# Altium PCB PCB.PcbDoc
Units mm, origin at the board's own origin, x right, y up, seen from the top; angles counter-clockwise.
Board outline 1240 x 25 mm, 2 copper layers (Top Layer, Bottom Layer); 39 components, 20 nets, 284 pads, 91 vias.
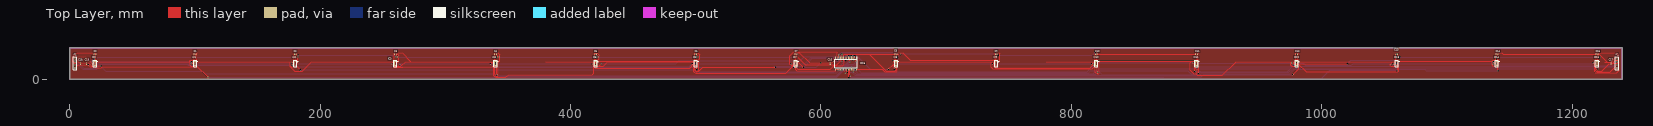
[diagram p0: Top Layer view]
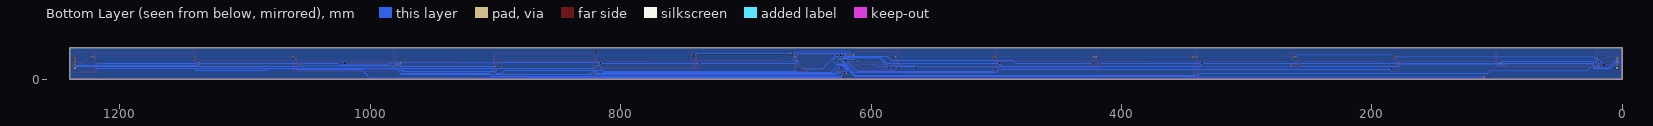
[diagram p1: Bottom Layer view, seen from below]
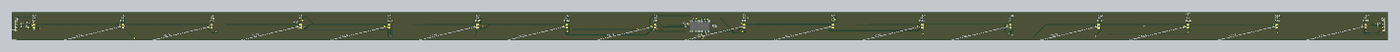
[diagram p2: 3D render of the assembled board from above, using the file's embedded part models]

## Layer stack, top to bottom
Top Solder: solder mask 0.0102, Solder Resist, Dk 3.5
Top Layer: signal copper 0.0356
Dielectric 1: dielectric 0.32, FR-4, Dk 4.8
Bottom Layer: signal copper 0.0356
Bottom Solder: solder mask 0.0102, Solder Resist, Dk 3.5

## Board outline
0,0 0,25 1240,25 1240,0

## Design rules (kind name [scope] priority, off if disabled: settings)
Clearance [All] p1: gap=0.254 ignorepadtopadclearanceinfootprint=FALSE except(0: Arc-Hole Track-Hole SMDPad-Hole THPad-Hole Via-Hole Fill-Hole Poly-Hole Region-Hole Text-Hole)
PolygonConnect [All] p1: connectstyle=Relief reliefconductorwidth=0.254 reliefentries=4 polygonreliefangle="90 Angle" airgapwidth=0.254
RoutingVias [All] p1: holewidth=0.711 width=1.27 viastyle="Through Hole" minholewidth=0.711 minwidth=1.27 maxholewidth=0.711 maxwidth=1.27
SolderMaskExpansion [All] p1: expansion=0.102 istentingtop=FALSE
Width [All] p1: maxlimit=0.254 minlimit=0.254 preferedwidth=0.254
30 further rules are at their usual default settings.

## Components (designator, comment, footprint, x,y, rotation, side; value= is the part's Value field where it differs from the comment)
C0 "100nF" CAPC1608X90N 20,20 r0 top locked
C1 "100nF" CAPC1608X90N 100,20 r180 top locked
C2 "100nF" CAPC1608X90N 180,20 r180 top locked
C3 "100nF" CAPC1608X90N 260,20 r180 top locked
C4 "100nF" CAPC1608X90N 340,20 r180 top locked
C5 "100nF" CAPC1608X90N 420,20 r180 top locked
C6 "100nF" CAPC1608X90N 500,20 r180 top locked
C7 "100nF" CAPC1608X90N 580,20 r180 top locked
C8 "100nF" CAPC1608X90N 660,20 r180 top locked
C9 "100nF" CAPC1608X90N 740,20 r180 top locked
C10 "100nF" CAPC1608X90N 820,20 r180 top locked
C11 "100nF" CAPC1608X90N 900,20 r0 top locked
C12 "100nF" CAPC1608X90N 980,20 r180 top locked
C13 "100nF" CAPC1608X90N 1060,20 r180 top locked
C14 "100nF" CAPC1608X90N 1140,20 r180 top locked
C15 "100nF" CAPC1608X90N 1220,20 r180 top locked
C16 "100nF" CAPC1608X90N 607.441,12.446 r90 top locked
C17 "100nF" CAPC1608X90N 1231.265,12.889 r270 top locked
C18 "100nF" CAPC1608X90N 8.382,12.319 r90 top locked
C19 "100uF" CAPC1608X90N 13.208,12.319 r270 top locked
IC0 "VL53L1X" VL53L1X 20,12.5 r0 top locked
IC1 "VL53L1X" VL53L1X 100,12.5 r0 top locked
IC2 "VL53L1X" VL53L1X 180,12.5 r0 top locked
IC3 "VL53L1X" VL53L1X 260,12.5 r0 top locked
IC4 "VL53L1X" VL53L1X 340,12.5 r0 top locked
IC5 "VL53L1X" VL53L1X 420,12.5 r0 top locked
IC6 "VL53L1X" VL53L1X 500,12.5 r0 top locked
IC7 "VL53L1X" VL53L1X 580,12.5 r0 top locked
IC8 "VL53L1X" VL53L1X 660,12.5 r0 top locked
IC9 "VL53L1X" VL53L1X 740,12.5 r0 top locked
IC10 "VL53L1X" VL53L1X 820,12.5 r0 top locked
IC11 "VL53L1X" VL53L1X 900,12.5 r0 top locked
IC12 "VL53L1X" VL53L1X 980,12.5 r0 top locked
IC13 "VL53L1X" VL53L1X 1060,12.5 r0 top locked
IC14 "VL53L1X" VL53L1X 1140,12.5 r0 top locked
IC15 "VL53L1X" VL53L1X 1220,12.5 r0 top locked
IC16 "MCP23017T-E_SO" SOIC127P1030X265-28N 620,12.5 r270 top locked
P1 "IN" HDR1X4 4,9 r90 top locked
P2 "OUT" HDR1X4 1236,9 r90 top locked

## Footprints (in the part's own frame and the unit in brackets; to place one, negate y for a bottom-side part, rotate by r counter-clockwise, add the part's x,y. Pads: shape width x height; smd on the part's side, far side on the other; paste and mask are expansions set on the pad)
CAPC1608X90N [mm]
  rect 0.78x0.99 smd: 1(-0.7,0) 2(0.7,0)
  body extent -0.8,-0.41 0.8,0.41, height 0.9
HDR1X4 [mm] "Connector; Header; 4 Position"
  rect 1.5x1.5 hole 0.9: 1(0,0)
  round 1.5 hole 0.9: 2(2.54,0) 3(5.08,0) 4(7.62,0)
  silkscreen extent -1.27,-1.27 8.89,1.27
SOIC127P1030X265-28N [mm]
  rect 1.85x0.65 smd: 1(-4.675,8.255) 2(-4.675,6.985) 3(-4.675,5.715) 4(-4.675,4.445) 5(-4.675,3.175) 6(-4.675,1.905) 7(-4.675,0.635) 8(-4.675,-0.635) 9(-4.675,-1.905) 10(-4.675,-3.175) 11(-4.675,-4.445) 12(-4.675,-5.715) 13(-4.675,-6.985) 14(-4.675,-8.255) 15(4.675,-8.255) 16(4.675,-6.985) 17(4.675,-5.715) 18(4.675,-4.445) 19(4.675,-3.175) 20(4.675,-1.905) 21(4.675,-0.635) 22(4.675,0.635) 23(4.675,1.905) 24(4.675,3.175) 25(4.675,4.445) 26(4.675,5.715) 27(4.675,6.985) 28(4.675,8.255)
  silkscreen extent -5.6,-8.95 3.4,8.95, body extent -5.15,-8.95 5.15,8.95, height 2.65
VL53L1X [mm]
  rect 0.5x0.5 smd: 1(0.8,1.6) 2(0.8,0.8) 3(0.8,0) 4(0.8,-0.8) 5(0.8,-1.6) 6(0,-1.6) 7(-0.8,-1.6) 8(-0.8,-0.8) 9(-0.8,0) 10(-0.8,0.8) 11(-0.8,1.6) 12(0,1.6)
  rect 0.25x0.08 smd: 13(0.675,1.89)
  silkscreen extent -1.25,-2.4 1.9,2.45, body extent -1.25,-2.45 1.25,2.45, height 1.56

## Part data
C0 C1 C2 C3 C4 C5 C6 C7 C8 C9 C10 C11 C12 C13 C14 C15 C16 C17 C18: library part 0603YC104K4T2A, "Capacitor", Manufacturer_Name="Kyocera AVX", Mouser Part Number=581-0603YC104K4, Arrow Part Number=0603YC104K4T2A, Arrow Price/Stock=https://www.arrow.com/en/products/0603yc104k4t2a/avx, Datasheet Link=https://componentsearchengine.com/Datasheets/1/06031A100FAT2A.pdf, Height=0.9mm, Manufacturer_Part_Number=0603YC104K4T2A, Mouser Price/Stock=https://www.mouser.co.uk/ProductDetail/AVX/0603YC104K4T2A/?qs=Cej1j9ztgjHj4I01NaBI3A%3D%3D
C19: library part 06033C474MAT2A, "Capacitor", Manufacturer_Name="Kyocera AVX", Mouser Part Number=581-06033C474MAT2A, Datasheet Link=https://componentsearchengine.com/Datasheets/1/06031A100FAT2A.pdf, Height=0.9mm, Manufacturer_Part_Number=06033C474MAT2A, Mouser Price/Stock=https://www.mouser.com/Search/Refine.aspx?Keyword=581-06033C474MAT2A
IC0 IC1 IC2 IC3 IC4 IC5 IC6 IC7 IC8 IC9 IC10 IC11 IC12 IC13 IC14 IC15: "Integrated Circuit", Manufacturer_Name=STMicroelectronics, Datasheet Link=https://www.st.com/resource/en/datasheet/vl53l1x.pdf, Height=1.6mm, Manufacturer_Part_Number=VL53L1X
IC16: "Integrated Circuit", Arrow Part Number=MCP23017T-E/SO, Manufacturer_Name=Microchip, Mouser Part Number=579-MCP23017T-E/SO, Arrow Price/Stock=https://www.arrow.com/en/products/mcp23017t-eso/microchip-technology?region=nac, Datasheet Link=http://ww1.microchip.com/downloads/en/DeviceDoc/20001952C.pdf, Height=2.65mm, Manufacturer_Part_Number=MCP23017T-E/SO, Mouser Price/Stock=https://www.mouser.co.uk/ProductDetail/Microchip-Technology/MCP23017T-E-SO?qs=usxtMOJb1RylPfT%252BJtgE3Q%3D%3D
P1 P2: library part "Header 4", "Header, 4-Pin", LatestRevisionDate=17-Jul-2002, LatestRevisionNote="Re-released for DXP Platform.", Publisher="Altium Limited"

## Via types
v1: diameter 1.27, hole 0.711, Top Layer to Bottom Layer, 91 vias

## Nets (pads, with @x,y where several pads share a name; then routed paths per layer and width w, separated by ;. In a path a pad name is that pad's centre, name@x,y a point inside that pad or via, vN(x,y) a via of type N, cw(c..) or ccw(c..) an arc to the next point about the centre after c; other vN are vias at no path point)
3.3V: C0.2 C1.2 C2.2 C3.2 C4.2 C5.2 C6.2 C7.2 C8.2 C9.2 C10.2 C11.2 C12.2 C13.2 C14.2 C15.2 C16.2 C17.2 C18.2 C19.1 IC0.1 IC0.7 IC0.11 IC0.13 IC1.1 IC1.7 IC1.11 IC1.13 IC2.1 IC2.7 IC2.11 IC2.13 IC3.1 IC3.7 IC3.11 IC3.13 IC4.1 IC4.7 IC4.11 IC4.13 IC5.1 IC5.7 IC5.11 IC5.13 IC6.1 IC6.7 IC6.11 IC6.13 IC7.1 IC7.7 IC7.11 IC7.13 IC8.1 IC8.7 IC8.11 IC8.13 IC9.1 IC9.7 IC9.11 IC9.13 IC10.1 IC10.7 IC10.11 IC10.13 IC11.1 IC11.7 IC11.11 IC11.13 IC12.1 IC12.7 IC12.11 IC12.13 IC13.1 IC13.7 IC13.11 IC13.13 IC14.1 IC14.7 IC14.11 IC14.13 IC15.1 IC15.7 IC15.11 IC15.13 IC16.9 P1.4 P2.1 | length 1970.9
  Top Layer w0.254: P1.4 5.156,15.464 ; IC0.7 16.919,10.9 14.8,13.019 C19.1 C18.2 7.601,13.019 5.156,15.464 ; IC0.11 19.2,14.738 20.65,14.738 20.65,14.39 IC0.13 ; IC1.7 96.506,10.9 96.114,11.292 96.114,14.51 96.647,15.043 ; IC2.7 178.277,9.977 177.024,9.977 176.149,10.852 ; C2.2 179.3,18.496 ; IC2.1 180.675,14.225 IC2.13 180.696,14.39 180.696,17.101 179.3,18.496 ; IC3.7 259.2,10.522 259.454,10.268 264.389,10.268 268.224,14.103 272.364,14.103 ; IC3.1 260.675,14.225 IC3.13 260.629,14.39 260.629,14.738 259.461,14.738 259.2,14.477 ; IC4.7 339.2,3.935 340.741,2.394 341.757,2.394 342.265,2.902 342.265,13.062 IC4.1@341.013,14.314 ; IC5.7 419.2,10.447 419.481,10.166 425.882,10.166 429.819,14.103 497.278,14.103 497.281,14.1 IC6.11 ; IC5.1 420.675,14.225 IC5.13 420.8,14.39 421.107,14.39 ; IC6.7 499.2,7.765 ; v1(563.626,9.531) 505.409,9.531 502.336,6.458 501.816,6.458 ; v1(578.209,9.531) 579.2,10.522 IC7.7 ; IC7.11 579.3,17.099 C7.2 579.3,20.682 579.935,21.317 582.727,21.317 590.898,13.146 v1(599.846,13.146) C16.2 608.439,13.146 v1(609.727,14.434) ; IC7.1 580.675,14.225 IC7.13 580.8,14.39 581.119,14.39 581.431,14.078 ; v1(581.431,9.531) 581.431,14.078 ; v1(585.978,9.531) 581.431,14.078 ; v1(617.017,14.434) 618.095,15.512 IC16.9 618.095,19.601 618.49,19.996 638.429,19.996 ; IC8.7 659.2,9.512 660.019,8.693 660.019,7.576 658.8,6.356 652.069,6.356 638.429,19.996 ; IC8.11 659.3,17.099 C8.2@659.3,19.996 ; IC8.13 660.675,14.225 IC8.1 737.235,14.1 ; IC9.7 739.191,10.891 739.191,10.522 739.445,10.268 741.451,10.268 741.451,13.824 741.175,14.1 IC9.1 ; C10.2 819.3,16.999 819.2,16.899 IC10.11 780.012,14.1 741.046,14.346 IC9.1 ; IC11.7 898.982,10.682 898.982,8.896 900.506,7.372 900.506,5.569 899.389,4.451 ; C11.2 900.7,17.202 900.675,17.177 IC11.13 ; IC11.1 900.675,14.225 IC11.13 ; IC12.7 978.695,10.395 976.008,10.395 975.131,11.272 975.131,14.1 ; IC13.7 1058.771,10.471 1055.243,10.471 1054.735,10.979 1054.735,11.995 1056.84,14.1 ; C13.2 1059.3,17.099 1059.2,16.999 1059.2,14.377 ; IC14.7 1136.196,10.9 1136.117,10.98 1136.117,14.637 ; IC14.1 1140.675,14.225 IC14.13 1140.638,14.39 1140.638,14.738 1139.571,14.738 1139.2,14.367 ; IC15.7 1219.2,7.982 1220.724,6.458 1223.924,6.458 1229.655,12.189 C17.2 ; IC15.11 1219.3,17.099 1219.3,18.499 ; IC15.1 1220.675,14.225 IC15.13 1220.699,14.39 1220.699,17.101 1219.3,18.499 ; P2.1 1237.131,10.131 1237.131,12.656 1237.106,12.681 1232.519,12.681 ; 5.156,15.464 5.156,13.57 4.394,12.808 3.607,12.808 2.337,14.078 2.337,17.863 5.74,21.266 20.116,21.266 20.7,20.682 C0.2 20.7,17.202 20.675,17.177 IC0.13 ; IC0.13 20.675,14.225 IC0.1 95.196,14.1 96.139,15.043 96.647,15.043 ; 96.647,15.043 98.257,15.043 IC1.11 99.2,16.999 99.3,17.099 C1.2 99.3,20.744 99.695,21.139 101.219,21.139 101.473,20.885 101.473,14.644 101.219,14.39 IC1.13 100.675,14.225 IC1.1 176.654,14.1 ; 176.149,10.852 176.149,13.595 176.654,14.1 ; 176.149,10.852 176.149,10.014 179.603,6.56 185.75,6.56 193.291,14.1 IC3.11 259.2,14.477 ; 176.654,14.1 IC2.11 179.3,17.099 179.3,18.496 ; 259.2,14.477 259.2,16.999 259.3,17.099 C3.2 259.3,20.682 259.706,21.088 265.379,21.088 272.364,14.103 ; 272.364,14.103 338.15,14.103 338.154,14.1 IC4.11 339.2,16.999 339.3,17.099 C4.2 339.3,20.74 339.725,21.165 341.605,21.165 343.408,19.361 343.408,14.771 343.027,14.39 IC4.13 340.675,14.225 IC4.1 IC4.1@341.013,14.314 ; IC4.1@341.013,14.314 341.046,14.346 380.013,14.1 IC5.11 419.2,16.999 419.3,17.099 C5.2 419.3,20.885 421.259,20.885 422.986,19.158 422.986,16.27 421.107,14.39 ; 421.107,14.39 498.91,14.39 IC6.11 ; 499.2,7.765 499.2,7.042 500.292,5.95 501.308,5.95 501.816,6.458 ; 499.2,7.765 500.507,6.458 501.816,6.458 ; IC6.11 499.2,16.999 499.3,17.099 C6.2 499.3,20.694 499.745,21.139 501.523,21.139 502.996,19.666 502.996,16.296 IC6.1@501.049,14.349 ; IC6.1@501.049,14.349 IC6.1 500.675,14.225 IC6.13 501.008,14.39 IC6.1@501.049,14.349 ; IC6.1@501.049,14.349 502.324,13.074 502.324,6.966 501.816,6.458 ; 638.429,19.996 C8.2@659.3,19.996 ; C8.2@659.3,19.996 C8.2 659.3,20.682 659.572,20.954 665.462,20.954 671.347,15.069 738.231,15.069 IC9.11 ; 737.235,14.1 IC9.11 ; 737.235,14.1 736.143,13.062 736.143,9.379 737.235,8.287 816.587,8.287 IC10.7 819.2,5.671 820.547,4.324 821.868,4.324 822.223,4.68 822.223,13.222 821.099,14.346 ; IC9.11 739.2,16.899 739.3,16.999 C9.2 739.3,20.682 739.833,21.215 742.467,21.215 743.001,20.682 743.001,14.822 742.569,14.39 IC9.13 740.675,14.225 IC9.1 ; 821.099,14.346 896.18,14.346 ; 821.099,14.346 821.046,14.346 IC10.1 820.675,14.225 IC10.13 821.055,14.39 821.099,14.346 ; 896.18,14.346 895.121,13.287 895.121,7.144 897.941,4.324 899.262,4.324 899.389,4.451 ; 896.18,14.346 897.782,14.346 898.028,14.1 IC11.11 899.2,14.397 899.541,14.738 900.633,14.738 900.633,14.39 IC11.13 ; 899.389,4.451 900.659,3.181 920.725,3.181 931.647,14.103 975.131,14.1 ; 975.131,14.1 975.661,14.1 IC12.11 979.2,16.999 979.3,17.099 C12.2 979.3,20.682 979.757,21.139 981.075,21.139 981.481,20.733 981.481,14.796 981.075,14.39 IC12.13 980.675,14.225 IC12.1 1056.84,14.1 ; 1056.84,14.1 IC13.11 1059.2,14.377 ; 1059.2,14.377 1059.561,14.738 1060.653,14.738 1060.653,14.39 IC13.13 1060.675,14.225 IC13.1 1060.905,14.205 1135.685,14.205 1136.117,14.637 ; 1136.117,14.637 1136.523,15.043 1138.257,15.043 IC14.11 1139.2,14.367 ; 1139.2,14.367 1139.2,16.999 1139.3,17.099 C14.2 1139.3,20.682 1139.859,21.241 1143.864,21.241 1145.108,19.996 C15.2@1219.3,19.996 ; 1219.3,18.499 C15.2@1219.3,19.996 ; C15.2@1219.3,19.996 C15.2 1219.3,20.782 1219.835,21.317 1235.456,21.317 1237.132,19.641 1237.132,15.754 1236.599,15.221 1235.059,15.221 1232.519,12.681 ; C17.2 1231.265,12.681 1232.519,12.681 ; C17.2 1232.027,12.189 1232.519,12.681
  Bottom Layer w0.254: v1(563.626,9.531) v1(578.209,9.531) v1(581.431,9.531) ; v1(585.978,9.531) 596.232,9.531 v1(599.846,13.146) ; v1(609.727,14.434) v1(617.017,14.434)
GND: C0.1 C1.1 C2.1 C3.1 C4.1 C5.1 C6.1 C7.1 C8.1 C9.1 C10.1 C11.1 C12.1 C13.1 C14.1 C15.1 C16.1 C17.1 C18.1 C19.2 IC0.2 IC0.3 IC0.4 IC0.6 IC0.12 IC1.2 IC1.3 IC1.6 IC1.12 IC2.2 IC2.3 IC2.4 IC2.6 IC2.12 IC3.2 IC3.3 IC3.4 IC3.6 IC3.12 IC4.2 IC4.3 IC4.4 IC4.6 IC4.12 IC5.3 IC5.4 IC5.6 IC5.12 IC6.2 IC6.3 IC6.4 IC6.6 IC6.12 IC7.2 IC7.3 IC7.4 IC7.6 IC7.12 IC8.2 IC8.3 IC8.4 IC8.6 IC8.12 IC9.2 IC9.3 IC9.4 IC9.6 IC9.12 IC10.2 IC10.3 IC10.4 IC10.12 IC11.2 IC11.3 IC11.4 IC11.6 IC11.12 IC12.2 IC12.3 IC12.4 IC12.6 IC12.12 IC13.2 IC13.3 IC13.4 IC13.6 IC13.12 IC14.2 IC14.3 IC14.4 IC14.6 IC14.12 IC15.2 IC15.3 IC15.4 IC15.6 IC15.12 IC16.10 IC16.15 IC16.16 IC16.17 P1.1 P2.4 | length 1683.9
  Top Layer w0.254: P1.1 6.619,11.619 C18.1 C19.2 v1(14.678,11.619) 16.4,9.897 ; v1(19.3,16.241) C0.1 ; v1(19.99,9.887) 16.41,9.887 16.4,9.897 ; IC0.12 20,13.57 20.27,13.3 IC0.2 IC0.3 IC0.4 20.416,11.7 20,11.284 IC0.6 v1@20,10.466 ; C1.1 100.7,16.429 100,15.729 IC1.12 100,13.824 100.524,13.3 IC1.2 IC1.3 100.454,12.5 100,12.046 IC1.6 100,9.912 99.975,9.887 25.73,9.887 25.136,9.293 20.604,9.293 20,9.897 v1@20,10.466 ; IC2.6 180,11.284 180.416,11.7 IC2.4 IC2.3 IC2.2 ; IC2.12 180,13.824 180.524,13.3 IC2.2 ; C2.1 C2.1@180.7,19.895 ; v1(181.991,19.234) 181.331,19.895 C2.1@180.7,19.895 ; IC3.6 260,11.284 260.416,11.7 IC3.4 IC3.3 ; IC3.12 260,13.824 260.524,13.3 IC3.2 IC3.3 ; v1(260.7,17.71) 260.7,18.986 ; C3.1 C3.1@260.7,19.895 ; v1(261.976,17.71) 260.7,18.986 ; IC4.6 340,11.284 340.416,11.7 IC4.4 IC4.3 IC4.2 340.524,13.3 340,13.824 IC4.12 340,15.729 340.7,16.429 v1(340.7,17.71) 340.7,19.385 ; C4.1 340.7,19.385 ; v1(342.375,17.71) 340.7,19.385 ; IC5.6 420,11.284 420.416,11.7 IC5.4 IC5.3 420.308,12.5 420,12.808 IC5.12 420,16.135 420.7,16.835 v1(420.7,17.71) 420.7,18.98 ; C5.1 420.7,18.98 ; v1(421.97,17.71) 420.7,18.98 ; IC6.6 500,11.284 500.416,11.7 IC6.4 IC6.3 IC6.2 500.524,13.3 500,13.824 IC6.12 500,15.729 500.7,16.429 v1(500.7,17.71) 500.7,18.99 ; C6.1 500.7,18.99 ; v1(501.98,17.71) 500.7,18.99 ; v1(580.7,17.71) v1@580.7,18.32 ; C7.1 v1@580.7,18.32 ; IC16.17 IC16.16 IC16.15 611.745,6.712 580.517,6.712 579.831,7.398 579.831,10.9 IC7.6 580,11.284 580.416,11.7 IC7.4 IC7.3 IC7.2 580.431,13.3 580,13.731 IC7.12 580,17.62 v1@580.7,18.32 ; v1(616.825,19.945) v1(616.825,19.398) IC16.10 616.825,16.11 612.461,11.746 C16.1 587.274,11.746 v1@580.7,18.32 ; IC8.6 660,11.173 660.527,11.7 IC8.4 IC8.3 IC8.2 660.441,13.3 660,13.741 IC8.12 660,17.005 v1(660.705,17.71) ; v1(660.7,17.71) C8.1@660.7,19.895 ; C8.1 C8.1@660.7,19.895 ; v1(663.219,19.895) C8.1@660.7,19.895 ; IC9.6 740,11.417 740.283,11.7 IC9.4 IC9.3 IC9.2 740.451,13.3 740,13.751 IC9.12 740,16.767 ; v1(741.299,18.752) 740.669,19.381 ; v1(741.985,18.752) 740,16.767 ; v1(819.302,21.571) 820.039,21.571 820.7,20.91 C10.1 ; IC10.4 IC10.3 IC10.2 820.461,13.3 820,13.761 IC10.12 820,15.715 820.7,16.415 C10.1 ; C11.1 C11.1@899.3,20.022 ; v1(900,9.887) IC11.6 900,11.397 900.303,11.7 IC11.4 ; IC11.12 900,13.771 900.471,13.3 IC11.2 IC11.3 IC11.4 ; IC12.6 980,11.7 980.008,11.708 ; v1(980.008,9.887) 980.008,11.708 ; C12.1 980.7,16.429 980,15.729 IC12.12 980,13.781 980.481,13.3 IC12.2 ; IC12.4 IC12.3 ; v1(1020.467,12.5) IC12.3 ; IC13.6 1060,11.377 1060.323,11.7 IC13.4 ; IC13.12 1060,13.791 1060.491,13.3 IC13.2 IC13.3 IC13.4 ; v1(1060.7,17.71) 1060.7,18.984 ; C13.1 1060.7,18.984 ; v1(1061.974,17.71) 1060.7,18.984 ; IC14.6 1140,11.367 1140.333,11.7 IC14.4 IC14.3 IC14.2 ; IC14.12 1140,13.801 1140.501,13.3 IC14.2 ; C14.1 v1(1140.7,17.71) 1140.7,15.489 1141.451,14.738 1141.451,13.468 IC14.2 ; IC15.6 1220,11.357 1220.343,11.7 IC15.4 IC15.3 IC15.2 ; IC15.12 1220,13.811 1220.511,13.3 IC15.2 ; C15.1 C15.1@1220.7,19.895 ; v1(1221.969,17.71) 1220.7,18.979 C15.1@1220.7,19.895 ; P2.4 1234.296,16.62 C17.1 1228.198,13.589 ; 16.4,9.897 19.431,9.897 v1@20,10.466 ; C2.1@180.7,19.895 180.7,19.001 v1(181.991,17.71) 181.991,13.253 181.483,12.745 181.355,12.745 IC2.2 ; 260.7,18.986 C3.1@260.7,19.895 ; C3.1@260.7,19.895 261.899,19.895 262.611,19.183 262.611,14.311 IC3.3 ; 740,16.767 740,18.712 740.669,19.381 ; 740.669,19.381 740.7,19.412 C9.1 740.669,19.381 ; C10.1 895.227,20 895.248,20.022 C11.1@899.3,20.022 ; C11.1@899.3,20.022 899.3,20.682 899.935,21.317 900.836,21.317 901.471,20.682 901.471,12.371 IC11.4 ; 980.008,11.708 980.008,12.508 IC12.2 ; 980.008,11.708 IC12.3 ; IC12.3 987.528,5.772 1060.831,5.772 1061.441,6.382 1061.441,11.344 1061.085,11.7 IC13.4 ; IC12.3 IC12.2 ; C15.1@1220.7,19.895 1221.892,19.895 1228.198,13.589 ; IC15.2 1226.169,13.589 1228.198,13.589
  Bottom Layer w0.254: v1(14.678,11.619) v1(19.3,16.241) ; v1(19.99,9.887) 19.99,15.551 22.149,17.71 v1(181.991,17.71) ; v1(181.991,19.234) 259.176,19.234 v1(260.7,17.71) ; v1(261.976,17.71) v1(340.7,17.71) ; v1(342.375,17.71) v1(420.7,17.71) ; v1(421.97,17.71) v1(500.7,17.71) ; v1(501.98,17.71) v1(580.7,17.71) ; v1(616.825,19.398) 617.83,20.403 ; v1(616.825,19.945) 617.282,20.403 617.83,20.403 ; v1(660.7,17.71) 658.008,20.403 ; v1(660.705,17.71) 658.012,20.403 658.008,20.403 ; v1(663.219,19.895) 663.778,20.453 739.597,20.453 v1(741.299,18.752) ; v1(741.985,18.752) 742.544,19.31 817.042,19.31 v1(819.302,21.571) ; v1(900,9.887) 974.877,9.887 977.417,12.427 978.535,12.427 980.008,10.954 v1(980.008,9.887) ; v1(1020.467,12.5) 1023.188,15.221 1058.211,15.221 v1(1060.7,17.71) ; v1(1061.974,17.71) v1(1140.7,17.71) v1(1221.969,17.71) ; 617.83,20.403 658.008,20.403
GPA0: IC8.5 IC16.28 | length 38.7
  Top Layer w0.254: IC16.28 628.255,7.83 649.148,7.83 651.129,5.848 660.527,5.848 661.086,6.407 661.086,10.9 IC8.5
GPA1: IC16.27
GPA2: IC10.5 IC16.26 | length 204.5
  Top Layer w0.254: v1(625.715,6.139) IC16.26 ; IC10.5 820.8,5.748 v1(821.207,5.34)
  Bottom Layer w0.254: v1(625.715,6.139) 628.038,3.816 819.683,3.816 v1(821.207,5.34)
GPA3: IC11.5 IC16.25 | length 290.1
  Top Layer w0.254: IC16.25 v1(624.445,9.506) ; IC11.5 901.7,10 v1(901.7,4.68)
  Bottom Layer w0.254: v1(624.445,9.506) 629.627,4.324 817.651,4.324 819.683,6.356 822.096,6.356 824.789,3.664 900.684,3.664 v1(901.7,4.68)
GPA4: IC12.5 IC16.24 | length 369.2
  Top Layer w0.254: IC16.24 623.175,2.967 v1(623.24,2.902) ; v1(976.782,3.74) 981.532,8.49 981.532,10.168 IC12.5
  Bottom Layer w0.254: v1(623.24,2.902) 624.357,1.784 903.643,1.784 905.599,3.74 v1(976.782,3.74)
GPA5: IC13.5 IC16.23 | length 452.2
  Top Layer w0.254: IC16.23 622.159,6.737 v1(622.159,1.251) ; v1(1060.292,6.788) 1060.8,7.296 IC13.5
  Bottom Layer w0.254: v1(622.159,1.251) 873.252,1.251 873.735,0.768 999.947,0.768 1006.475,7.296 1059.784,7.296 v1(1060.292,6.788)
GPA6: IC14.5 IC16.22 | length 529.7
  Top Layer w0.254: IC16.22 620.635,5.975 v1(621.143,5.467) ; v1(1140.8,6.788) IC14.5
  Bottom Layer w0.254: v1(621.143,5.467) 624.688,5.467 627.05,3.105 902.716,3.105 903.91,4.299 974.595,4.299 978.151,7.855 1082.599,7.855 1083.666,6.788 v1(1140.8,6.788)
GPA7: IC15.5 IC16.21 | length 616.2
  Top Layer w0.254: v1(619.354,4.909) 619.365,4.92 IC16.21 ; v1(1220.8,8.363) IC15.5
  Bottom Layer w0.254: v1(619.354,4.909) 619.354,7.195 622.681,10.522 626.923,10.522 632.181,5.264 813.765,5.264 815.365,6.864 893.013,6.864 895.401,4.477 899.465,4.477 900.684,5.696 902.462,5.696 902.716,5.442 973.887,5.442 976.808,8.363 v1(1220.8,8.363)
GPB0: IC0.5 IC16.1 | length 619
  Top Layer w0.254: IC0.5 24.158,10.9 v1(24.714,10.344) ; v1(628.255,14.027) IC16.1
  Bottom Layer w0.254: v1(24.714,10.344) 28.702,6.356 105.537,6.356 107.594,4.299 280.797,4.299 280.822,4.274 337.947,4.274 339.954,2.267 612.442,2.267 622.221,12.046 626.274,12.046 v1(628.255,14.027)
GPB1: IC1.5 IC16.2 | length 545.7
  Top Layer w0.254: IC1.5 v1(110.322,1.378) ; IC16.2 v1(626.985,18.879)
  Bottom Layer w0.254: v1(110.322,1.378) 612.801,1.378 622.961,11.538 627.761,11.538 629.285,13.062 629.285,16.579 v1(626.985,18.879)
GPB2: IC2.5 IC16.3 | length 453.4
  Top Layer w0.254: IC2.5 v1(184.023,7.677) ; v1(625.704,15.5) 625.715,15.512 IC16.3
  Bottom Layer w0.254: v1(184.023,7.677) 497.789,7.677 500.482,4.985 612.763,4.985 623.278,15.5 v1(625.704,15.5)
GPB3: IC3.5 IC16.4 | length 370.1
  Top Layer w0.254: IC3.5 262.865,10.9 v1(263.373,11.408) ; IC16.4 v1(624.445,18.853)
  Bottom Layer w0.254: v1(263.373,11.408) 265.148,9.633 561.696,9.633 562.61,10.547 586.918,10.547 593.039,16.669 622.261,16.669 v1(624.445,18.853)
GPB4: IC4.5 IC16.5 | length 297.6
  Top Layer w0.254: IC4.5 340.8,3.859 v1(341.249,3.41) ; v1(623.175,13.926) IC16.5
  Bottom Layer w0.254: v1(341.249,3.41) 341.757,2.902 612.151,2.902 v1(623.175,13.926)
GPB5: IC5.5 IC16.6 | length 206.1
  Top Layer w0.254: IC5.5 423.059,10.9 v1(424.358,12.198) ; IC16.6 v1(621.905,18.853)
  Bottom Layer w0.254: v1(424.358,12.198) 483.794,12.198 486.308,14.713 583.336,14.713 586.461,17.837 620.889,17.837 v1(621.905,18.853)
GPB6: IC6.5 IC16.7 | length 129.2
  Top Layer w0.254: v1(500.8,7.855) IC6.5 ; v1(619.785,14.992) 620.635,15.842 IC16.7
  Bottom Layer w0.254: v1(500.8,7.855) 502.832,5.823 610.616,5.823 v1(619.785,14.992)
GPB7: IC7.5 IC16.8 | length 48
  Top Layer w0.254: IC7.5 580.8,10.627 580.404,10.231 580.404,8.998 581.598,7.804 607.263,7.804 610.413,10.954 617.601,10.954 618.693,12.046 618.693,15.565 619.365,16.237 IC16.8
SCL: IC0.10 IC1.10 IC2.10 IC3.10 IC4.10 IC5.10 IC6.10 IC7.10 IC8.10 IC9.10 IC10.10 IC11.10 IC12.10 IC13.10 IC14.10 IC15.10 IC16.12 P1.2 P2.3 | length 1512.7
  Top Layer w0.254: v1(18.186,13.291) 18.196,13.3 IC0.10 ; v1(97.155,14.027) 97.882,13.3 IC1.10 ; v1(177.165,13.011) 177.454,13.3 IC2.10 ; v1(257.15,12.503) 257.946,13.3 IC3.10 ; v1(335.763,12.503) 336.559,13.3 IC4.10 ; v1(417.144,12.503) 417.941,13.3 IC5.10 ; v1(497.154,12.5) 497.954,13.3 IC6.10 ; v1(576.138,12.5) 576.938,13.3 IC7.10 ; IC16.12 v1(614.285,19.37) ; v1(657.682,14.789) 658.038,14.434 658.038,13.722 658.46,13.3 IC8.10 ; v1(737.159,12.503) 737.956,13.3 IC9.10 ; v1(816.254,12.503) 817.045,12.503 817.842,13.3 IC10.10 ; v1@897.153,13.291 v1(897.153,13.3) IC11.10 ; v1(976.147,12.935) 977.189,12.935 977.554,13.3 IC12.10 ; v1(1057.148,12.503) 1057.945,13.3 IC13.10 ; v1(1137.157,14.027) 1137.884,13.3 IC14.10 ; v1(1216.923,13.3) 1218.803,13.3 ; IC15.10 1218.803,13.3 ; P2.3 1236.762,13.318 1237.383,13.318 1237.639,13.062 1237.639,7.32 1235.608,5.29 1218.717,5.29 1218.057,5.95 1218.057,12.554 1218.803,13.3
  Bottom Layer w0.254: P1.2 2.845,12.695 2.845,14.586 3.48,15.221 4.851,15.221 11.201,8.871 19.329,8.871 ; v1(18.186,13.291) 18.186,10.014 19.329,8.871 ; v1(417.144,12.503) v1(335.763,12.503) ; v1@897.153,13.291 817.042,13.291 v1(816.254,12.503) v1(737.159,12.503) 659.968,12.503 v1(657.682,14.789) 660.4,14.789 661.721,16.11 661.721,19.92 660.095,21.546 616.461,21.546 v1(614.285,19.37) 615.179,19.37 616.204,18.345 619.887,18.345 621.411,19.869 622.464,19.869 622.921,19.412 622.921,18.103 622.122,17.304 591.693,17.304 586.889,12.5 v1(576.138,12.5) v1(497.154,12.5) 494.795,10.141 338.125,10.141 v1(335.763,12.503) ; v1(897.153,13.3) 897.518,12.935 v1(976.147,12.935) 985.342,12.935 987.069,11.208 1023.823,11.208 1025.119,12.503 v1(1057.148,12.503) 1135.206,12.503 ; v1(1137.157,14.027) 1136.315,13.185 ; v1(1216.923,13.3) 1216.127,12.503 1138.83,12.503 1138.149,13.185 1136.315,13.185 ; 19.329,8.871 21.031,8.871 ; 21.031,8.871 21.615,8.871 22.174,9.43 22.174,10.014 ; 21.031,8.871 22.174,10.014 ; 22.174,10.014 22.174,12.198 ; 22.174,12.198 22.174,13.062 22.962,13.849 v1@96.977,13.849 ; 22.174,12.198 22.479,12.503 95.631,12.503 v1@96.977,13.849 ; v1@96.977,13.849 97.155,13.849 v1(97.155,14.027) ; v1@96.977,13.849 v1(97.155,14.027) ; v1(97.155,14.027) 98.679,12.503 176.657,12.503 v1(177.165,13.011) 177.165,12.503 v1(257.15,12.503) v1(335.763,12.503) ; 1135.206,12.503 1135.633,12.503 1136.315,13.185 ; 1135.206,12.503 1135.888,13.185 1136.315,13.185
SDA: IC0.9 IC1.9 IC2.9 IC3.9 IC4.9 IC5.9 IC6.9 IC7.9 IC8.9 IC9.9 IC10.9 IC11.9 IC12.9 IC13.9 IC14.9 IC15.9 IC16.13 P1.3 P2.2 | length 1660
  Top Layer w0.254: P1.3 3.175,14.08 2.845,14.41 2.845,17.126 3.505,17.786 12.237,17.786 18.13,11.894 18.567,12.331 19.031,12.331 IC0.9 ; v1(97.13,12.275) 97.355,12.5 IC1.9 ; v1(177.495,11.005) 177.495,11.763 178.232,12.5 IC2.9 ; v1(258.191,10.09) v1@258.547,10.446 ; IC4.9 338.557,12.5 338.557,11.03 ; IC5.9 418.567,12.5 418.567,10.014 ; IC7.9 578.561,12.5 ; v1(613.015,15.475) IC16.13 613.015,21.229 612.267,21.977 578.231,21.977 575.031,18.777 575.031,12.046 576.58,10.776 578.304,12.5 578.561,12.5 ; v1(653.926,7.88) 658.546,12.5 ; v1(658.546,7.88) 658.546,12.5 ; IC8.9 658.546,12.5 ; IC9.9 738.556,12.5 738.556,9.76 739.267,9.049 815.188,9.049 v1(818.058,11.919) ; v1(818.058,11.309) v1(818.058,11.919) ; IC10.9 818.639,12.5 v1(818.058,11.919) ; v1(898.474,6.204) 898.474,12.195 898.779,12.5 IC11.9 ; v1(978.052,11.411) 978.052,11.767 978.786,12.5 IC12.9 ; v1(1055.751,11.487) 1057.808,11.487 1058.821,12.5 IC13.9 ; v1(1137.133,12.148) 1137.485,12.5 IC14.9 ; IC15.9 1218.819,12.5 1218.565,12.246 1218.565,6.966 1219.581,5.95 1230.41,5.95 P2.2 ; v1@258.547,10.446 258.547,12.351 ; v1@258.547,10.446 258.547,10.014 258.835,9.725 266.056,9.725 266.116,9.785 337.312,9.785 338.557,11.03 ; 258.547,12.351 258.547,12.5 IC3.9 259.051,12.351 258.547,12.351 ; 338.557,11.03 338.557,2.902 340.081,1.378 348.336,1.378 350.545,3.588 417.22,3.588 418.567,4.934 418.567,10.014 ; 418.567,10.014 419.633,8.947 495.224,8.947 498.551,12.275 ; 498.551,12.275 498.777,12.5 IC6.9 498.551,12.275 ; 498.551,12.275 498.551,5.95 499.821,4.68 571.729,4.68 578.561,11.513 578.561,12.5
  Bottom Layer w0.254: P1.3 10.149,7.931 21.615,7.931 22.682,8.998 22.682,10.497 24.003,11.817 93.878,11.817 ; v1(97.13,12.275) 96.672,11.817 93.878,11.817 ; v1(258.191,10.09) 178.41,10.09 v1(177.495,11.005) 94.691,11.005 93.878,11.817 ; v1(613.015,15.475) 618.185,15.475 618.871,16.161 623.748,16.161 625.704,18.117 625.704,19.412 626.186,19.895 627.507,19.895 639.521,7.88 v1(653.926,7.88) ; v1(658.546,7.88) 660.502,5.925 812.673,5.925 v1(818.058,11.309) ; v1(818.058,11.919) 821.588,8.388 974.979,8.338 ; v1(898.474,6.204) 903.224,6.204 903.402,6.026 972.668,6.026 974.979,8.338 ; v1(1137.133,12.148) 1138.657,10.624 1235.084,10.624 ; P2.2 1235.084,10.624 ; 974.979,8.338 v1(978.052,11.411) 978.052,10.319 979.5,8.871 980.618,8.871 982.294,10.547 1055.751,10.547 v1(1055.751,11.487) 1057.148,10.09 1234.55,10.09 1235.084,10.624
pads on no net: IC0.8 IC1.4 IC1.8 IC2.8 IC3.8 IC4.8 IC5.2 IC5.8 IC6.8 IC7.8 IC8.8 IC9.5 IC9.8 IC10.6 IC10.8 IC11.8 IC12.8 IC13.8 IC14.8 IC15.8 IC16.11 IC16.14 IC16.18 IC16.19 IC16.20

## Polygon pours and split planes (outlines as drawn)
GND on Top Layer "GND_L01_P000" (solid, pour order 0): 0.254,24.892 0.381,25.019 1239.901,25.019 1239.901,0 1239.774,0.127 0,0.127 0,24.892 0.127,25.019
GND on Bottom Layer "GND_L02_P001" (solid, pour order 1): 0,25.019 1240.028,25.019 1240.028,0 0,0

## Keep-outs
Keep-Out Layer:
  the board outline again, w0.254

## Dimensions
0,0 to 20,12.5 on Top Overlay
1236,9 to 1240,0 on Top Overlay
4,9 to -1.524,0 on Top Overlay
4,9 to 0,-6.223 on Top Overlay
1140,-6.477 to 1220,12.5 on Top Overlay
1060,-6.477 to 1140,12.5 on Top Overlay
980,-6.477 to 1060,12.5 on Top Overlay
900,-6.477 to 980,12.5 on Top Overlay
820,-6.477 to 900,12.5 on Top Overlay
740,-6.477 to 820,12.5 on Top Overlay
660,-6.477 to 740,12.5 on Top Overlay
580,-6.477 to 660,12.5 on Top Overlay
500,-6.477 to 580,12.5 on Top Overlay
420,-6.477 to 500,12.5 on Top Overlay
340,-6.477 to 420,12.5 on Top Overlay
260,-6.477 to 340,12.5 on Top Overlay
180,-6.477 to 260,12.5 on Top Overlay
100,-6.477 to 180,12.5 on Top Overlay
20,-6.477 to 100,12.5 on Top Overlay